# Altium PCB PCB1.PcbDoc
Units mm, origin at the board's own origin, x right, y up, seen from the top; angles counter-clockwise.
Board outline 16.51 x 57.15 mm, 2 copper layers (Top Layer, Bottom Layer); 2 components, 34 nets, 80 pads, 0 vias.
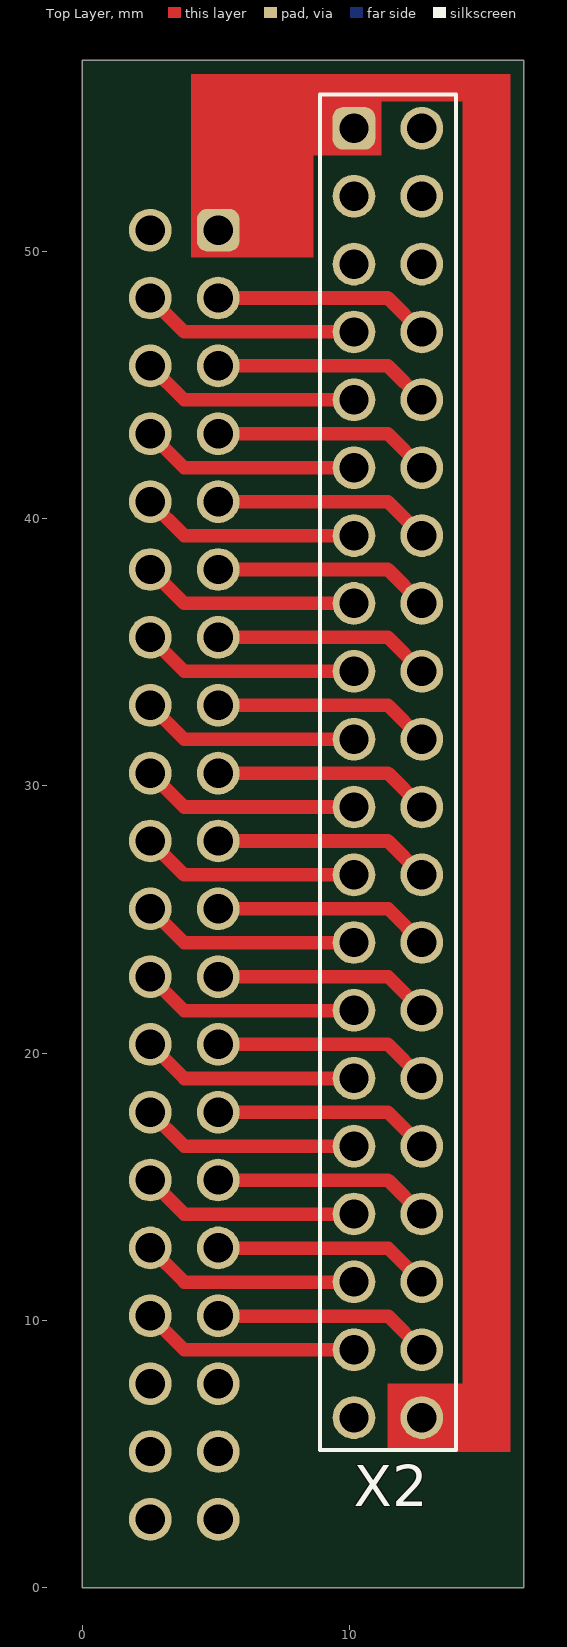
[diagram p0: Top Layer view]
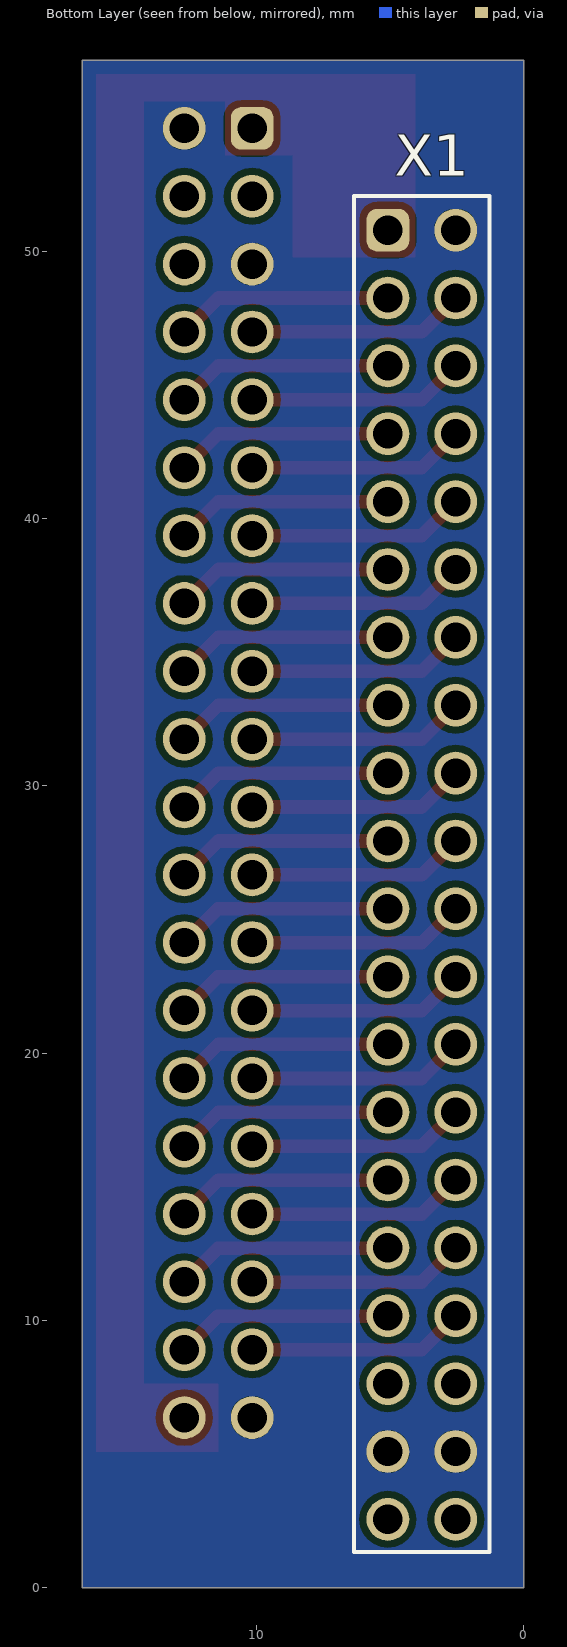
[diagram p1: Bottom Layer view, seen from below]

## Layer stack, top to bottom
Top Solder: solder mask 0.0102, Solder Resist, Dk 3.5
Top Layer: signal copper 0.0356
Dielectric 1: dielectric 0.32, FR-4, Dk 4.8
Bottom Layer: signal copper 0.0356
Bottom Solder: solder mask 0.0102, Solder Resist, Dk 3.5

## Board outline
0,0 16.51,0 16.51,57.15 0,57.15

## Design rules (kind name [scope] priority, off if disabled: settings)
Clearance Clearance_2 [InNamedPolygon('Bottom Layer-gnd')] p1: gap=0.254 ignorepadtopadclearanceinfootprint=FALSE except(0: Arc-Hole Track-Hole SMDPad-Hole THPad-Hole Via-Hole Fill-Hole Poly-Hole Region-Hole Text-Hole)
Clearance Clearance_1 [InNamedPolygon('Bottom Layer-gnd')] p2: gap=0.254 ignorepadtopadclearanceinfootprint=TRUE except(0: Arc-Hole Track-Hole SMDPad-Hole THPad-Hole Via-Hole Fill-Hole Poly-Hole Region-Hole Text-Hole)
Clearance [All] p3: gap=0.254 ignorepadtopadclearanceinfootprint=FALSE except(0: Arc-Hole Track-Hole SMDPad-Hole THPad-Hole Via-Hole Fill-Hole Poly-Hole Region-Hole Text-Hole)
PolygonConnect PolygonConnect_1 [All vs IsNamedPolygon('Bottom Layer-gnd')] p1: connectstyle=Relief reliefconductorwidth=0.254 reliefentries=4 polygonreliefangle="90 Angle" airgapwidth=0
PolygonConnect [All] p2: connectstyle=Relief reliefconductorwidth=0.254 reliefentries=4 polygonreliefangle="90 Angle" airgapwidth=0.254
RoomDefinition Sheet1 [InComponentClass('Sheet1')] p1: confinementstyle=ConfineIn formatcopy=TRUE lockcomponents=FALSE outline -5.842,57.15 -0.254,57.15 -0.254,63.754 -5.842,63.754
RoutingVias [All] p1: holewidth=0.711 width=1.27 viastyle="Through Hole" minholewidth=0.711 minwidth=1.27 maxholewidth=0.711 maxwidth=1.27
SolderMaskExpansion [All] p1: expansion=0.102
Width [All] p1: maxlimit=0.254 minlimit=0.508 preferedwidth=0.254 minimp=50.000000 maximp=50.000000 favimp=50.000000
30 further rules are at their usual default settings.

## Components (designator, comment, footprint, x,y, rotation, side; value= is the part's Value field where it differs from the comment)
X1 "PLD40" PLD-40 3.81,36.83 r270 bottom
X2 "PLD40" PLD-40 11.43,40.64 r270 top

## Footprints (in the part's own frame and the unit in brackets; to place one, negate y for a bottom-side part, rotate by r counter-clockwise, add the part's x,y. Pads: shape width x height; smd on the part's side, far side on the other; paste and mask are expansions set on the pad)
PLD-40 [mm]
  rrect50% 1.6x1.6 hole 1.1: 1(-13.97,-1.27)
  round 1.6 hole 1.1: 2(-13.97,1.27) 3(-11.43,-1.27) 4(-11.43,1.27) 5(-8.89,-1.27) 6(-8.89,1.27) 7(-6.35,-1.27) 8(-6.35,1.27) 9(-3.81,-1.27) 10(-3.81,1.27) 11(-1.27,-1.27) 12(-1.27,1.27) 13(1.27,-1.27) 14(1.27,1.27) 15(3.81,-1.27) 16(3.81,1.27) 17(6.35,-1.27) 18(6.35,1.27) 19(8.89,-1.27) 20(8.89,1.27) 21(11.43,-1.27) 22(11.43,1.27) 23(13.97,-1.27) 24(13.97,1.27) 25(16.5,-1.27) 26(16.5,1.27) 27(19.04,-1.27) 28(19.04,1.27) 29(21.58,-1.27) 30(21.58,1.27) 31(24.12,-1.27) 32(24.12,1.27) 33(26.66,-1.27) 34(26.66,1.27) 35(29.2,-1.27) 36(29.2,1.27) 37(31.74,-1.27) 38(31.74,1.27) 39(34.28,-1.27) 40(34.28,1.27)
  silkscreen extent -15.24,-2.54 35.5,2.54, body extent -15.24,-2.56 35.52,2.54, height 8.5

## Part data
X1 X2: "Штыри на плату, шаг 2.54мм., двухрядные", ManufacturerPartNumber=PLD40, Type=Вилка

## Nets (pads, with @x,y where several pads share a name; then routed paths per layer and width w, separated by ;. In a path a pad name is that pad's centre, name@x,y a point inside that pad or via, vN(x,y) a via of type N, cw(c..) or ccw(c..) an arc to the next point about the centre after c; other vN are vias at no path point)
5V: X1.1 X2.1 X2.40
CLK1: X1.17 X2.22 | length 8.1
  Top Layer w0.508: X1.17 11.43,30.48 X2.22
CLK2: X1.20 X2.23 | length 8.1
  Top Layer w0.508: X1.20 3.81,26.67 X2.23
GND: X1.2 X1.37 X1.38 X2.2 X2.5 X2.39
P10: X1.15 X2.20 | length 8.1
  Top Layer w0.508: X1.15 11.43,33.02 X2.20
P11: X1.16 X2.19 | length 8.1
  Top Layer w0.508: X1.16 3.81,31.75 X2.19
P12: X1.13 X2.18 | length 8.1
  Top Layer w0.508: X1.13 11.43,35.56 X2.18
P13: X1.14 X2.17 | length 8.1
  Top Layer w0.508: X1.14 3.81,34.29 X2.17
P14: X1.11 X2.16 | length 8.1
  Top Layer w0.508: X1.11 11.43,38.1 X2.16
P15: X1.12 X2.15 | length 8.1
  Top Layer w0.508: X1.12 3.81,36.83 X2.15
P16: X1.9 X2.14 | length 8.1
  Top Layer w0.508: X1.9 11.43,40.64 X2.14
P17: X1.10 X2.13 | length 8.1
  Top Layer w0.508: X1.10 3.81,39.37 X2.13
P18: X1.7 X2.12 | length 8.1
  Top Layer w0.508: X1.7 11.43,43.18 X2.12
P19: X1.8 X2.11 | length 8.1
  Top Layer w0.508: X1.8 3.81,41.91 X2.11
P20: X1.33 X2.38 | length 8.1
  Top Layer w0.508: X1.33@5.09,10.16 11.44,10.16 X2.38
P21: X1.34 X2.37 | length 8.1
  Top Layer w0.508: X1.34 3.81,8.9 X2.37
P22: X1.31 X2.36 | length 8.1
  Top Layer w0.508: X1.31@5.09,12.7 11.44,12.7 X2.36
P23: X1.32 X2.35 | length 8.1
  Top Layer w0.508: X1.32 3.81,11.44 ; 3.81,11.43 X2.35@10.16,11.43
P24: X1.29 X2.34 | length 8.1
  Top Layer w0.508: X1.29 11.43,15.25 X2.34
P25: X1.30 X2.33 | length 8.1
  Top Layer w0.508: X1.30 3.81,13.98 ; 3.81,13.97 X2.33@10.16,13.97
P26: X1.27 X2.32 | length 8.1
  Top Layer w0.508: X1.27 11.43,17.79 X2.32
P27: X1.28 X2.31 | length 8.1
  Top Layer w0.508: X1.28 3.81,16.52 ; 3.81,16.51 X2.31@10.16,16.51
P28: X1.25 X2.30 | length 8.1
  Top Layer w0.508: X1.25 11.43,20.33 X2.30
P29: X1.26 X2.29 | length 8.1
  Top Layer w0.508: X1.26 3.81,19.06 ; 3.81,19.05 X2.29@10.16,19.05
P110: X1.5 X2.10 | length 8.1
  Top Layer w0.508: X1.5 11.43,45.72 X2.10
P111: X1.6 X2.9 | length 8.1
  Top Layer w0.508: X1.6 3.81,44.45 X2.9
P112: X1.3 X2.8 | length 8.1
  Top Layer w0.508: X1.3 11.43,48.26 X2.8
P113: X1.4 X2.7 | length 8.1
  Top Layer w0.508: X1.4 3.81,46.99 X2.7
P210: X1.23 X2.28 | length 8.1
  Top Layer w0.508: X1.23 11.44,22.86 X2.28
P211: X1.24 X2.27 | length 8.1
  Top Layer w0.508: X1.24 3.81,21.59 X2.27@10.16,21.59
P212: X1.21 X2.26 | length 8.1
  Top Layer w0.508: X1.21 11.44,25.4 X2.26
P213: X1.22 X2.25 | length 8.1
  Top Layer w0.508: X1.22 3.81,24.13 X2.25@10.16,24.13
WRT1: X1.18 X2.21 | length 8.1
  Top Layer w0.508: X1.18 3.81,29.21 X2.21
WRT2: X1.19 X2.24 | length 8.1
  Top Layer w0.508: X1.19 11.43,27.94 X2.24
pads on no net: X1.35 X1.36 X1.39 X1.40 X2.3 X2.4 X2.6

## Polygon pours and split planes (outlines as drawn)
GND on Bottom Layer "Bottom Layer-gnd" (solid, pour order 4): 0,57.15 16.51,57.15 16.51,0 0,0

## Other copper
Top Layer:
  region net 5V: 11.43,7.62 11.43,5.08 16.002,5.08 16.002,56.642 4.064,56.642 4.064,49.784 8.636,49.784 8.636,53.594 11.176,53.594 11.176,55.626 14.224,55.626 14.224,7.62